# Altium PCB BauhallenUhr_Variante_2.PcbDoc (part 2 of 2)
Units mm, origin at the board's own origin, x right, y up, seen from the top; angles counter-clockwise.
Board outline 106.68 x 66.04 mm, 4 copper layers (Top Layer, Signal Layer 2, GND Layer 3, Bottom Layer), stack 1.54 mm thick; 120 components, 80 nets, 567 pads, 180 vias.
Unrouted connection lines stored in the file: 12.
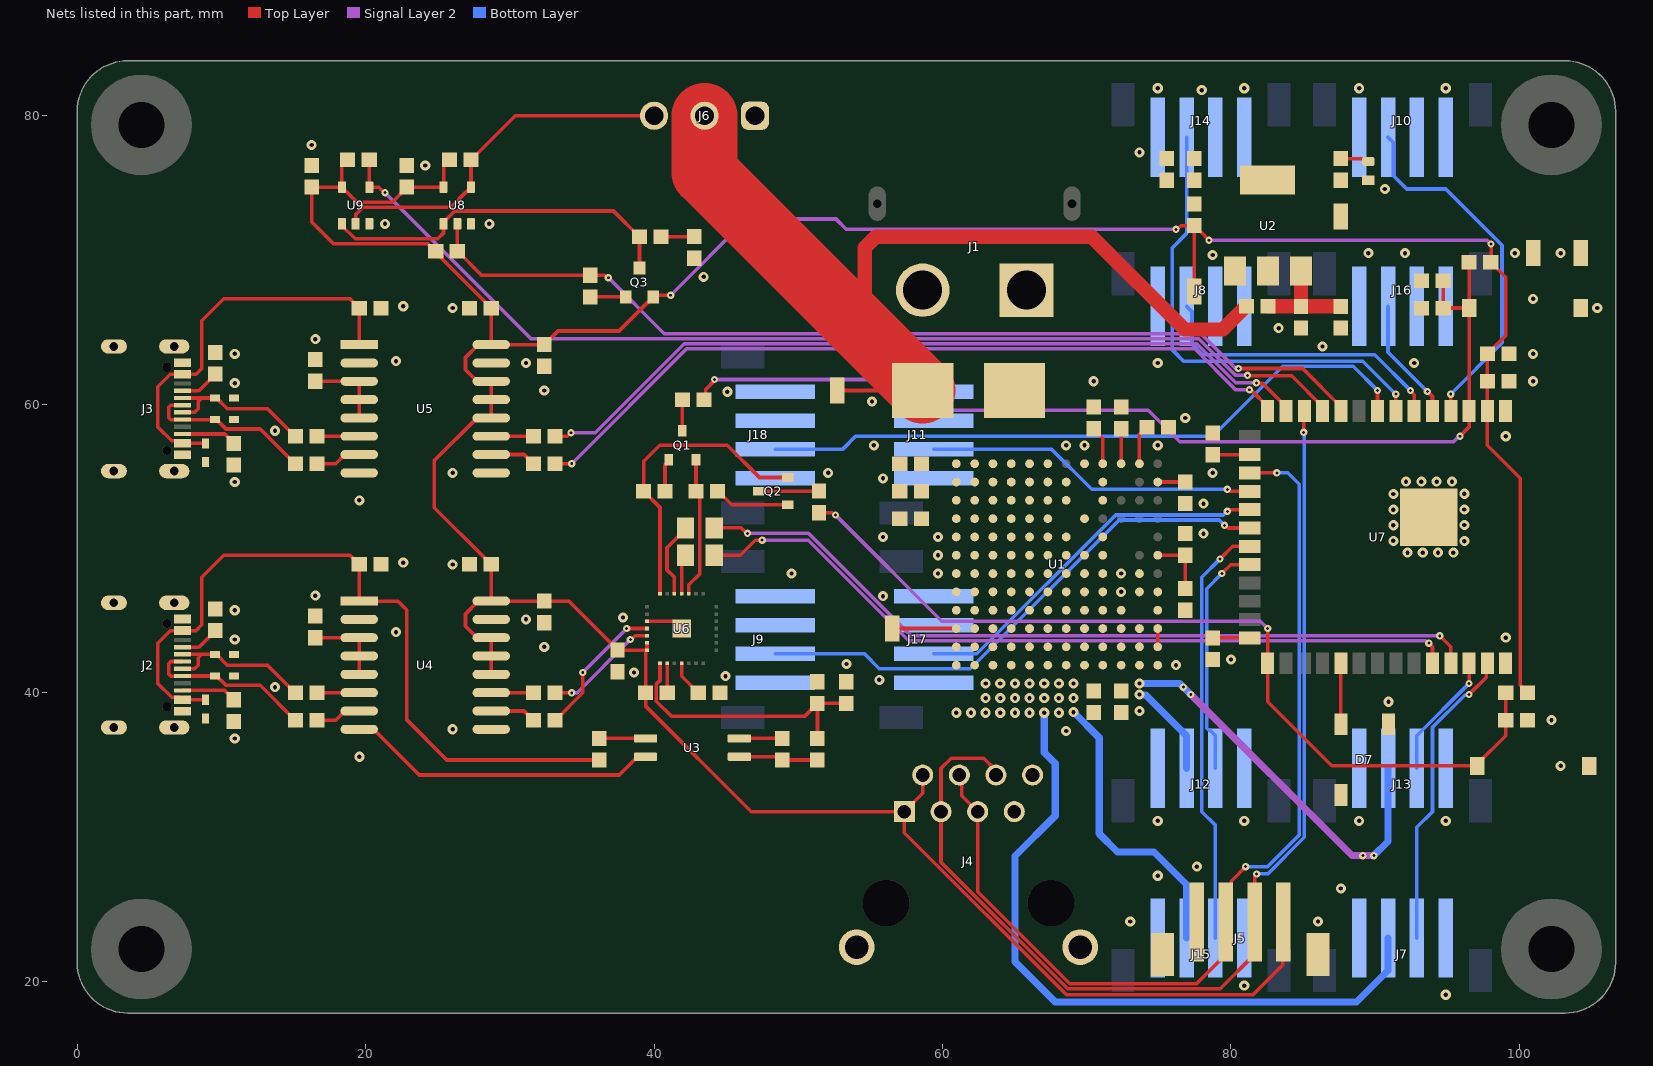
[diagram p4: the nets of this part, all layers, seen from the top]

## Part data
C1 C2 C3 C4 C5 C6 C7 C8 C9 C10 C11 C12 C13 C14 C15 C16 C17 C18 C19 C20 C21 C22 C23 C24 C25 C26 C27 C28 C29: library part Capacitor, "0603"
D1 D2 D3 D4 D5 D6: library part ESD_Protection_Diode, ComponentLink1Description=Supplier, ComponentLink1URL=https://www.digikey.com/en/products/detail/onsemi/ESD5B5-0ST1G/1792206
F1: library part Fuse, "FUSE BRD MNT 10A 125VAC/VDC SMD"
J1: library part PCB_Connector, "Socket, DC supply, male, PIN: 2.", Package=Package, Check_prices=https://www.snapeda.com/parts/XT60PW-M/AMASS/view-part/?ref=eda, MF=AMASS, MP=XT60PW-M, SnapEDA_Link=https://www.snapeda.com/parts/XT60PW-M/AMASS/view-part/?ref=snap
J2 J3: "USB - C - Port"
J4: library part RJ45, "Jack Modular Connector 8p8c (RJ45, Ethernet) 90Â° Angle (Right) Shielded Cat3.", Package=None, Check_prices=https://www.snapeda.com/parts/RJE091884511C/Amphenol/view-part/?ref=eda, MF="Amphenol ICC (Commercial Products)", MP=RJE091884511C, SnapEDA_Link=https://www.snapeda.com/parts/RJE091884511C/Amphenol/view-part/?ref=snap, System=Connector
J5: library part Connector_SMD_Small_Symbol, "CONN HEADER SMD 4POS 2MM.", ComponentLink1Description=Supplier, ComponentLink1URL=https://www.digikey.ch/en/products/detail/jst-sales-america-inc/B4B-PH-SM4-TB/926643
J6: library part Screw_Connector, "691214110003 Wurth Elektronik"
J7 J8 J9 J10 J11 J12 J13 J14 J15 J16 J17 J18: library part Connector_SMD, "CONN HEADER SMD 4POS 2MM.", ComponentLink1Description=Supplier, ComponentLink1URL=https://www.digikey.ch/en/products/detail/jst-sales-america-inc/B4B-PH-SM4-TB/926643
LED1: library part "LED_0603, GREEN", "LED 0603, Green, 3.2 V, 20 mA, 430 mcd"
MEC1 MEC2 MEC3 MEC4: "Mounting Hole for M3 Screw, plated to connect signal"
Q1 Q2: library part NPN_Bipolar_Transistor, "SS8050 SOT - 23.", ComponentLink1Description=Supplier, ComponentLink1URL=https://www.digikey.com/en/products/detail/guangdong-inmark-electronics-co-ltd/SS8050/28539054
Q3: library part PNP_Bipolar_Transistor, "Bipolar (BJT) Transistor PNP 25 V 500 mA 150MHz 300 mW Surface Mount SOT-23."
R1 R2 R3 R4 R5 R6 R7 R8 R9 R10 R11 R12 R13 R14 R15 R16 R17 R18 R20 R22 R23 R24 R25 R26 R27 R28 R29 R30 R31 R32 R33 R34 R35 R36 R37 R38 R39 R40: library part Resistor, "0603"
R19 R21: library part 0805_Resistor, "0805"
S1 S2: library part Button
TP1 TP2 TP3 TP4 TP5 TP6: "Prüfstecker und Messbuchsen EZ BoardWare S27 SMT Mini Test Terminal, Reel"
U1: library part DCDC_Converter, "Module DC-DC 1-OUT 0.6V to 5V 15A Automotive 133-Pin BGA Tray.", Package="BGA -133 Analog Devices", Availability="In Stock", Check_prices=https://www.snapeda.com/parts/LTM4627EY%23PBF/Analog+Devices/view-part/?ref=eda, MF="Analog Devices", MP=LTM4627EY#PBF, Price=None, Purchase-URL=https://pricing.snapeda.com/search/part/LTM4627EY#PBF/?ref=eda, SnapEDA_Link=https://www.snapeda.com/parts/LTM4627EY%23PBF/Analog+Devices/view-part/?ref=snap
U2: "LDO, 3.3V and 800mA.", ComponentLink1Description=Datasheet, ComponentLink1URL=chrome-extension://efaidnbmnnnibpcajpcglclefindmkaj/https://www.st.com/content/ccc/resource/technical/document/datasheet/99/3b/7d/91/91/51/4b/be/CD00000544.pdf/files/CD00000544.pdf/jcr:content/translations/en.CD00000544.pdf, ComponentLink2Description=Supplier, ComponentLink2URL=https://www.digikey.ch/en/products/detail/stmicroelectronics/LD1117S33CTR/585765
U3: library part Optocoupler, "Optoisolator Transistor Output 3750Vrms 1 Channel 4-SO."
U4 U5: library part USB_Digital_Isolator, "DGT ISOL 2500VRMS 2CH USB 16SOIC."
U6: "USB to UART bridge.", ComponentLink1Description=Datasheet, ComponentLink1URL=chrome-extension://efaidnbmnnnibpcajpcglclefindmkaj/https://www.silabs.com/documents/public/data-sheets/cp2102n-datasheet.pdf, ComponentLink2Description=Supplierlink, ComponentLink2URL=https://www.digikey.ch/en/products/detail/silicon-laboratories-inc/CP2102N-A02-GQFN28R/9863486?utm_source=findchips&utm_medium=aggregator&utm_campaign=buynow
U7: library part ESP32-S3-WROOM-2-N32R16V, "Bluetooth, WiFi 802.11b/g/n, Bluetooth v5.0 Transceiver Module 2.4GHz PCB Trace Surface Mount", Manufacturer="Espressif Systems", Supplier 1 Part Number=1965-ESP32-S3-WROOM-2-N32R16VCT-ND, Supplier 2 Part Number=356-SP32S3WM2N32R16V, Assembly Technology=SMD, ComponentLink1Description="Show Datasheet on SMS Drive", ComponentLink1URL="P:\Electronic Workshop\Datasheets (Refered in Libraries - Don't Change!)\ESP32-S3-WROOM-2-N32R16V_Digikey_1965-ESP32-S3-WROOM-2-N32R16VCT-ND.pdf", Latest Revision Date=17.10.2025, Latest Revision Made By="Simon Gimple", Latest Revision Note="New Part", Manufacturer Part Number=ESP32-S3-WROOM-2-N32R16V, Supplier 1=DigiKey, Supplier 2=Mouser
U8: library part Single_Bus_Buffer_Gate, "Single Bus Buffer Gate With 3-State Outputs, DBV0005A, LARGE T&R.", ComponentLink1Description=Supplier, ComponentLink1URL=https://www.digikey.com/en/products/detail/texas-instruments/SN74LVC1G126DBVR/385722
U9: library part Single_Bus_Buffer_Gate_Inverted, "Single Bus Buffer Gate With 3-State Outputs, DBV0005A, LARGE T&R.", ComponentLink1Description=Supplier

## Via types
v1: diameter 0.7, hole 0.3, Top Layer to Bottom Layer, 120 vias
v2: diameter 0.508, hole 0.203, Top Layer to Bottom Layer, 44 vias
v3: diameter 0.7, hole 0.3, Top Layer to Bottom Layer, tented top, 16 vias

## Nets (pads, with @x,y where several pads share a name; then routed paths per layer and width w, separated by ;. In a path a pad name is that pad's centre, name@x,y a point inside that pad or via, vN(x,y) a via of type N, cw(c..) or ccw(c..) an arc to the next point about the centre after c; other vN are vias at no path point)
+3.3V: C18.1 C19.1 C20.2 C21.2 C22.2 C23.2 C24.2 C28.2 C29.2 J4.1 J4.2 J5.1 Q3.2 R6.2 R20.2 R27.2 R32.2 R38.2 R39.2 R40.2 TP6.1 U4.12 U4.13 U4.14 U4.16 U5.12 U5.13 U5.14 U5.16 U6.6 U6.7 U7.2 U8.5 U9.5 | length 254.6
  Top Layer w0.25: R40.2@18.751,76.962 18.726,76.962 18.351,76.587 U9.5@18.351,75.062 ; R39.2@25.805,76.962 25.78,76.962 25.405,76.587 U8.5@25.405,75.062 C28.2@22.86,75.062 22.86,75.037 21.833,74.01 19.403,74.01 18.626,74.787 18.501,74.787 18.351,74.937 U9.5@18.351,75.062 ; U4.12@28.708,41.273 U4.13@28.708,42.543 U4.14@28.708,43.813 27.72,43.813 26.924,44.609 26.924,45.464 27.813,46.353 U4.16@28.708,46.353 ; U6.7@39.41,42.95 C22.2@37.465,42.95 37.465,42.975 34.087,46.353 C18.1@32.385,46.353 U4.16@28.708,46.353 ; U6.6@39.51,43.45 U6.7@39.51,42.95 39.41,42.85 R20.2@39.41,40.005 39.41,39.076 46.736,31.75 J4.1@57.36,31.75 ; v2(41.148,67.564) 40.05,67.564 Q3.2@39.939,67.453 39.939,67.403 39.664,67.128 39.614,67.128 37.571,65.085 33.335,65.085 C19.1@32.385,64.135 U5.16@28.708,64.135 ; J4.2@58.63,34.29 58.63,33.02 J4.1@57.36,31.75 ; v2(76.2,72.136) 76.27,72.136 76.524,72.39 R6.2@77.47,72.39 TP6.1@77.47,67.818 ; R6.2@77.47,72.365 77.845,71.99 77.87,71.99 v2(78.486,71.374) ; J5.1@83.645,24.094 83.599,24.048 83.599,21.115 81.534,19.05 68.606,19.05 57.36,30.296 J4.1@57.36,31.75 ; v2(98.044,71.12) 98.044,69.874 R27.2@98.02,69.85 99.06,68.81 99.06,64.77 C24.2@97.79,63.5 C23.2@97.79,61.595 U7.2@97.79,59.537 97.79,57.15 100.076,54.864 100.076,40.526 100.16,40.442 100.16,40.38 100.535,40.005 R32.2@100.56,40.005 ; U9.5@18.351,75.062 C29.2@16.256,75.062 16.256,72.644 17.78,71.12 24.322,71.12 24.83,70.612 24.88,70.612 25.255,70.237 25.255,70.128 28.308,67.075 28.308,67.05 28.683,66.675 C21.2@28.708,66.675 U5.16@28.708,64.135 ; U4.16@28.708,46.353 C20.2@28.708,48.893 28.683,48.893 28.308,49.268 28.308,49.293 24.765,52.836 24.765,56.1 27.72,59.055 U5.12@28.708,59.055 U5.13@28.708,60.325 U5.14@28.708,61.595 27.72,61.595 26.924,62.391 26.924,63.246 27.813,64.135 U5.16@28.708,64.135
  Signal Layer 2 w0.25: v2(41.148,67.564) 46.438,72.854 52.616,72.854 53.333,72.136 v2(76.2,72.136) ; v2(78.486,71.374) 97.769,71.374 98.023,71.12 v2(98.044,71.12)
+5V: C1.2 C8.2 C10.2 D7.1 J7.2 J8.2 J9.2 J10.2 J11.2 J12.2 J13.2 J14.2 J15.2 J16.2 J17.2 J18.2 R18.2 TP3.1 U1.J1 U1.J2 U1.J3 U1.J4 U1.J5 U1.J6 U1.J7 U1.J8 U1.J9 U1.J10 U1.J12 U1.K1 U1.K2 U1.K3 U1.K4 U1.K5 U1.K6 U1.K7 U1.K8 U1.K9 U1.K10 U1.K11 U1.L1 U1.L2 U1.L3 U1.L4 U1.L5 U1.L6 U1.L7 U1.L8 U1.L9 U1.L10 U1.L11 U1.M1 U1.M2 U1.M3 U1.M4 U1.M5 U1.M6 U1.M7 U1.M8 U1.M9 U1.M10 U1.M11 U3.4 | length 111.1
  Top Layer w0.25: U3.4@45.91,36.83 R18.2@48.895,36.83 ; TP3.1@56.515,44.45 U1.K1@60.96,44.45
  Signal Layer 2 w0.5: v2(77.216,39.878) 88.392,28.702 v2(89.916,28.702)
  Bottom Layer w0.5: v1(67.056,38.608) 67.056,35.854 67.818,35.092 67.818,31.462 65.024,28.668 65.024,21.336 67.818,18.542 88.705,18.542 90.9,20.737 J7.2@90.9,22.987 ; v1(69.087,38.653) 70.866,36.873 70.866,30.226 72.136,28.956 74.676,28.956 76.93,26.702 J15.2@76.93,22.987 ; v1(73.66,39.878) 73.698,39.84 74.102,39.84 76.93,37.012 J12.2@76.93,34.762 ; v1(73.66,40.64) 76.454,40.64 v2(77.216,39.878) ; v2(89.916,28.702) 90.9,29.686 J13.2@90.9,34.762
  other v1: 60.96,38.608 61.976,38.608 62.992,38.608 64.008,38.608 65.024,38.608 66.04,38.608 68.072,38.608 62.992,39.624 64.008,39.624 65.024,39.624 66.04,39.624 67.056,39.624 68.072,39.624 69.088,39.624 62.992,40.64 64.008,40.64 65.024,40.64 66.04,40.64 67.056,40.64 68.072,40.64 69.088,40.64
  other v2: 89.154,28.702 76.708,40.386
+12V: C9.2 C11.2 C12.2 F1.2 J6.2 R2.1 R3.2 TP1.1 U1.A1 U1.A2 U1.A3 U1.A4 U1.A5 U1.A6 U1.B1 U1.B2 U1.B3 U1.B4 U1.B5 U1.B6 U1.C1 U1.C2 U1.C3 U1.C4 U1.C5 U1.C6 | length 67.1
  Top Layer w0.25: TP1.1@52.705,60.96 F1.2@58.63,60.96
  Top Layer w1: 54.334,65.256 54.61,65.532 54.61,70.866 55.372,71.628 70.358,71.628 76.8,65.186 79.447,65.186 81.05,66.79 R2.1@81.075,66.79
  Top Layer w4.572: J6.2@43.505,80.01 43.505,76.085 54.334,65.256 F1.2@58.63,60.96
D1: J7.3 U7.39 | length 21.2
  Top Layer w0.25: v2(96.52,39.878) 97.7,41.058 97.7,41.947 U7.39@97.79,42.037
  Bottom Layer w0.25: J7.3@92.9,22.987 92.9,30.67 93.98,31.75 93.98,37.597 96.212,39.829 96.471,39.829 v2(96.52,39.878)
D2: J13.3 U7.38 | length 8.8
  Top Layer w0.25: v2(96.52,40.64) U7.38@96.52,42.037
  Bottom Layer w0.25: J13.3@92.9,34.762 92.9,37.012 96.52,40.632 v2(96.52,40.64)
D3: J10.3 U7.4 | length 25.3
  Top Layer w0.25: U7.4@95.25,59.537 v2(95.25,60.706)
  Bottom Layer w0.25: J10.3@90.9,78.522 91.275,78.147 91.275,75.857 92.202,74.93 94.911,74.93 98.806,71.035 98.806,64.262 v2(95.25,60.706)
D4: J16.3 U7.5 | length 8.5
  Top Layer w0.25: v2(93.626,60.89) 93.98,60.536 U7.5@93.98,59.537
  Bottom Layer w0.25: J16.3@90.9,66.801 90.9,63.616 v2(93.626,60.89)
D5: J8.3 U7.6 | length 20.8
  Top Layer w0.25: v2(92.456,60.96) 92.456,60.916 92.71,60.662 U7.6@92.71,59.537
  Bottom Layer w0.25: J8.3@76.93,66.801 77.305,66.426 77.305,64.176 78.048,63.433 89.983,63.433 v2(92.456,60.96)
D6: J14.3 U7.7 | length 33.1
  Top Layer w0.25: U7.7@91.44,59.537 v2(91.44,60.706)
  Bottom Layer w0.25: J14.3@76.93,78.522 76.93,71.85 75.946,70.866 75.946,63.767 76.721,62.992 89.154,62.992 v2(91.44,60.706)
D7: J11.3 U7.18 | length 23.1
  Top Layer w0.25: v2(79.756,54.102) 79.826,54.102 79.966,53.962 U7.18@81.3,53.962
  Bottom Layer w0.25: J11.3@59.4,56.871 67.589,56.871 70.358,54.102 v2(79.756,54.102)
D8: J17.3 U7.19 | length 26
  Top Layer w0.25: v2(79.756,52.578) 79.826,52.578 79.94,52.692 U7.19@81.3,52.692
  Bottom Layer w0.25: J17.3@59.4,42.692 59.402,42.694 62.379,42.694 72.009,52.324 79.481,52.324 79.735,52.578 v2(79.756,52.578)
D9: J9.3 U7.20 | length 37.8
  Top Layer w0.25: v2(79.555,51.608) 79.625,51.608 79.811,51.422 U7.20@81.3,51.422
  Bottom Layer w0.25: J9.3@48.4,42.692 54.59,42.692 55.626,41.656 61.933,41.656 72.251,51.974 79.19,51.974 v2(79.555,51.608)
D10: J15.3 U7.21 | length 29.6
  Top Layer w0.25: v2(79.248,49.276) 80.124,50.152 U7.21@81.3,50.152
  Bottom Layer w0.25: J15.3@78.93,22.987 78.93,30.798 77.978,31.75 77.978,48.006 v2(79.248,49.276)
D11: J12.3 U7.22 | length 16.4
  Top Layer w0.25: v2(79.375,48.26) 79.997,48.882 U7.22@81.3,48.882
  Bottom Layer w0.25: J12.3@78.93,34.762 78.93,37.012 78.555,37.387 78.474,37.387 78.328,37.533 78.328,47.213 v2(79.375,48.26)
D12: J18.3 U7.8 | length 46.3
  Top Layer w0.25: U7.8@90.17,59.537 v2(90.17,60.96)
  Bottom Layer w0.25: J18.3@48.4,56.871 53.061,56.871 53.975,57.785 78.74,57.785 83.597,62.642 88.488,62.642 v2(90.17,60.96)
DATA: J6.3 R39.1 U8.4 U9.2 | length 25.3
  Top Layer w0.25: U9.2@19.301,72.512 19.301,73.149 19.812,73.66 25.903,73.66 27.03,74.787 27.155,74.787 27.305,74.937 U8.4@27.305,75.062 R39.1@27.305,76.962 ; R39.1@27.33,76.962 30.378,80.01 J6.3@40.005,80.01
DTR: Q2.2 R28.2 U6.28 | length 21
  Top Layer w0.25: U6.28@40.41,46.85 40.41,52.845 39.28,53.975 39.28,56.044 40.386,57.15 45.085,57.15 47.31,54.925 Q2.2@49.27,54.925
EN: C25.2 C26.2 R27.1 R30.2 S1.2 U7.3 | length 71.4
  Top Layer w0.25: R30.2@43.46,60.325 43.597,60.462 43.597,61.054 44.196,61.652 v2(44.196,61.722) ; C25.2@94.73,68.58 C26.2@94.73,66.675 S1.2@96.52,66.675 ; v2(95.885,57.785) 96.52,58.42 U7.3@96.52,59.537 S1.2@96.52,66.675 ; R27.1@96.52,69.85 S1.2@96.52,66.675
  Signal Layer 2 w0.25: v2(44.196,61.722) 55.525,61.722 57.663,59.584 74.274,59.584 76.454,57.404 95.44,57.404 95.821,57.785 v2(95.885,57.785)
GND: C2.1 C3.1 C4.1 C5.1 C6.1 C7.1 C8.1 C9.1 C10.1 C11.1 C12.1 C15.2 C18.2 C19.2 C20.1 C21.1 C22.1 C23.1 C24.1 C25.1 C26.1 C27.1 C28.1 C29.1 D7.3 J1.2 J4.7 J4.8 J4.SH1 J4.SH2 J5.4 J5.SH1 J5.SH2 J6.1 J7.1 J7.4 J8.1 J8.4 J9.1 J9.4 J10.1 J10.4 J11.1 J11.4 J12.1 J12.4 J13.1 J13.4 J14.1 J14.4 J15.1 J15.4 J16.1 J16.4 J17.1 J17.4 J18.1 J18.4 LED1.K R1.1 R4.1 R13.1 R26.1 R33.2 R34.2 R37.1 S1.1 S2.1 TP4.1 TP5.1 U1.A8 U1.B7 U1.B9 U1.C7 U1.C9 U1.D1 U1.D2 U1.D3 U1.D4 U1.D5 U1.D6 U1.D8 U1.E1 U1.E2 U1.E3 U1.E4 U1.E5 U1.E6 U1.E7 U1.E9 U1.F1 U1.F2 U1.F3 U1.F4 U1.F5 U1.F6 U1.F7 U1.F8 U1.F9 U1.G1 U1.G2 U1.G3 U1.G4 U1.G5 U1.G6 U1.G7 U1.G8 U1.G9 U1.G11 U1.H1 U1.H2 U1.H3 U1.H4 U1.H5 U1.H6 U1.H7 U1.H8 U1.H9 U1.H11 U1.H12 U1.M12 U2.1 U4.9 U4.15 U5.9 U5.15 U6.3 U6.29 U7.1 U7.40 U7.41 U8.3 U9.3 | length 2.6
  Top Layer w0.25: U6.3@39.51,44.95 41.41,44.95 U6.29@41.91,44.45
  other v1: 94.9,19.05 80.93,19.685 73.025,24.13 86.045,24.13 87.63,26.416 74.93,27.305 77.645,27.94 74.93,31.115 80.93,31.115 88.9,31.115 94.9,31.115 102.87,34.925 68.58,37.338 26.035,37.465 102.235,38.1 73.66,38.735 90.93,39.37 55.626,40.894 44.958,41.148 38.608,41.402 76.2,41.91 53.34,41.987 80.01,42.302 32.385,43.18 99.06,43.815 31.115,45.085 37.846,45.212 55.88,46.692 72.39,46.99 49.53,48.26 59.69,48.26 72.39,48.26 26.035,48.895 59.69,49.53 55.88,50.8 59.69,50.8 78.105,51.03 78.105,53.11 55.88,54.864 26.035,55.245 52.07,55.245 78.74,55.245 55.245,57.15 68.58,57.15 69.85,57.15 74.93,57.15 99.06,57.785 76.835,59.055 55.118,60.198 45.085,60.871 32.385,60.96 70.485,61.595 100.965,61.595 31.115,62.865 74.93,62.865 92.71,62.865 100.965,63.5 86.36,64.008 83.312,65.278 26.035,66.675 105.41,66.675 100.965,67.31 43.434,68.834 78.74,70.358 89.535,70.485 92.075,70.485 99.695,70.485 102.87,70.485 21.336,72.512 28.575,72.517 90.678,74.93 24.13,76.562 73.66,77.47 16.256,77.978 77.978,81.788 74.93,81.915 80.93,81.915 88.9,81.915 94.9,81.915
  other v3: 92.246,49.71 93.308,49.71 94.37,49.71 95.432,49.71 96.195,50.51 91.27,50.526 91.27,51.61 96.195,51.626 91.27,52.694 96.195,52.71 91.27,53.778 96.195,53.794 92.145,54.635 93.207,54.635 94.269,54.635 95.331,54.635
GND_A: C13.1 C16.2 D1.A D3.A D5.A J2.A1_B12 J2.B1_A12 J2.SH1 J2.SH2 J2.SH3 J2.SH4 R7.2 R8.2 U3.2 U4.2 U4.8 | length 21.7
  Top Layer w0.25: U4.8@19.552,37.463 20.54,37.463 23.713,34.29 37.592,34.29 38.702,35.4 39.25,35.4 U3.2@39.41,35.56
  other v1: 19.558,35.558 10.922,36.828 13.716,40.384 10.922,43.686 22.098,44.196 10.922,45.718 16.51,46.734 22.606,49.02
GND_B: C14.1 C17.2 D2.A D4.A D6.A J3.A1_B12 J3.B1_A12 J3.SH1 J3.SH2 J3.SH3 J3.SH4 R9.2 R10.2 U5.2 U5.8
  other v1: 19.558,53.34 10.922,54.61 13.716,58.166 10.922,61.468 22.098,62.992 10.922,63.5 16.51,64.516 22.606,66.802
GPIO0: C27.2 R31.2 R32.1 S2.2 U7.27 | length 61.8
  Top Layer w0.25: R31.2@51.435,52.475 52.357,52.475 52.508,52.324 v2(52.578,52.324) ; v2(82.55,44.45) 82.55,39.37 86.995,34.925 S2.2@97.09,34.925 97.09,35.05 99.06,37.02 C27.2@99.06,38.1 R32.1@99.06,40.005
  Signal Layer 2 w0.25: v2(52.578,52.324) 59.944,44.958 82.042,44.958 v2(82.55,44.45)
GPIO19: D4.K J3.A7 J3.B7 R16.1 | length 11
  Top Layer w0.25: J3.A7@7.295,59.44 8.132,59.44 8.382,59.69 8.382,60.198 8.624,60.44 8.636,60.44 ; J3.B7@7.295,60.44 8.636,60.44 ; R16.1@15.125,57.785 15.1,57.785 13.195,59.69 10.41,59.69 9.66,60.44 D4.K@9.56,60.44 8.636,60.44
GPIO19_2: R24.2 U7.13 | length 55.4
  Top Layer w0.25: R24.2@33.135,57.785 33.97,57.785 34.211,58.026 v2(34.236,58.026) ; v2(81.767,61.489) 81.816,61.44 82.217,61.44 83.82,59.837 U7.13@83.82,59.537
  Signal Layer 2 w0.25: v2(34.236,58.026) 35.928,58.026 42.097,64.195 77.635,64.195 80.34,61.489 v2(81.767,61.489)
GPIO20: D6.K J3.A6 J3.B6 R17.1 | length 11.8
  Top Layer w0.25: J3.A6@7.295,59.94 7.291,59.944 6.496,59.944 6.35,59.798 6.35,59.074 6.496,58.928 7.283,58.928 J3.B6@7.295,58.94 D6.K@9.56,58.94 9.66,58.94 10.31,58.29 12.69,58.29 15.1,55.88 R17.1@15.125,55.88
GPIO20_2: R25.2 U7.14 | length 54.7
  Top Layer w0.25: R25.2@33.135,55.88 v2(34.29,55.88) ; v2(81.288,61.01) 81.337,60.961 81.426,60.961 82.55,59.837 U7.14@82.55,59.537
  Signal Layer 2 w0.25: v2(34.29,55.88) 42.255,63.845 77.49,63.845 80.324,61.01 v2(81.288,61.01)
NetC1_1: C1.1 R1.2 U1.F12 | length 4.2
  Top Layer w0.25: U1.F12@74.93,49.53 R1.2@76.835,49.53 C1.1@76.835,47.22
NetC2_2: C2.2 C3.2 R2.2 U2.3 | length 7.5
  Top Layer w1: R2.2@82.575,66.79 C2.2@84.861,66.79 ; U2.3@84.861,69.24 C2.2@84.861,66.79 ; C3.2@87.63,66.79 C2.2@84.861,66.79
NetC4_2: C4.2 C6.2 R5.2 R6.1 TP2.1 U2.2 U2.4
NetC5_2: C5.2 U1.A9 | length 2.7
  Top Layer w0.25: C5.2@70.485,58.305 70.485,58.28 71.12,57.645 U1.A9@71.12,55.88
NetC7_2: C7.2 U1.A11 | length 2.8
  Top Layer w0.25: U1.A11@73.66,55.88 73.66,57.925 74.155,58.42 C7.2@74.18,58.42
NetC15_1: C15.1 R12.1 R13.2 U6.8 | length 19.2
  Top Layer w0.25: U6.8@40.41,42.05 40.41,40.848 40.16,40.598 40.16,39.412 41.218,38.354 50.43,38.354 R13.2@51.331,39.255 ; R12.1@51.331,36.83 R13.2@51.331,39.255 ; C15.1@53.34,39.255 R13.2@51.331,39.255
NetC16_1: C16.1 U4.3 U4.4 U4.5 | length 5.6
  Top Layer w0.25: C16.1@16.51,43.813 U4.3@19.552,43.813 U4.5@19.552,41.273
NetC17_1: C17.1 U5.3 U5.4 U5.5 | length 5.6
  Top Layer w0.25: C17.1@16.51,61.595 U5.3@19.552,61.595 U5.5@19.552,59.055
NetD7_4: D7.4 U7.31 | length 4.2
  Top Layer w0.25: D7.4@87.63,37.809 U7.31@87.63,42.037
NetF1_1: F1.1 J1.1
NetJ2_A5: J2.A5 R8.1 | length 2.8
  Top Layer w0.25: J2.A5@7.295,43.158 8.435,43.158 9.56,44.283 R8.1@9.56,44.308
NetJ2_B5: J2.B5 R7.1 | length 3.8
  Top Layer w0.25: J2.B5@7.295,40.158 10.235,40.158 10.86,39.533 R7.1@10.86,39.508
NetJ3_A5: J3.A5 R10.1 | length 2.8
  Top Layer w0.25: J3.A5@7.295,60.94 8.435,60.94 9.56,62.065 R10.1@9.56,62.09
NetJ3_B5: J3.B5 R9.1 | length 3.8
  Top Layer w0.25: J3.B5@7.295,57.94 10.235,57.94 10.86,57.315 R9.1@10.86,57.29
NetLED1_A: LED1.A R5.1 | length 2
  Top Layer w0.25: R5.1@87.63,77.04 89.215,77.04 89.415,76.84 LED1.A@89.535,76.84
NetQ1_1: Q1.1 R28.1 | length 2.3
  Top Layer w0.25: R28.1@40.755,53.975 40.755,55.785 41.01,56.04 Q1.1@41.01,56.14
NetQ1_3: Q1.3 R30.1 | length 2.2
  Top Layer w0.25: Q1.3@41.96,58.16 R30.1@41.96,60.325
NetQ2_1: Q2.1 R29.1 | length 5.3
  Top Layer w0.25: R29.1@44.41,53.975 44.435,53.975 45.385,53.025 Q2.1@49.27,53.025
NetQ2_3: Q2.3 R31.1 | length 4.2
  Top Layer w0.25: Q2.3@47.25,53.975 R31.1@51.435,53.975
NetQ3_1: Q3.1 R35.1 | length 2.5
  Top Layer w0.25: R35.1@35.56,67.453 Q3.1@38.039,67.453
NetR3_1: R3.1 U1.A10 | length 2.4
  Top Layer w0.25: U1.A10@72.39,55.88 R3.1@72.39,58.305
NetR4_2: R4.2 U1.B12 | length 1.9
  Top Layer w0.25: U1.B12@74.93,54.61 R4.2@76.835,54.61
NetR11_1: R11.1 U3.1 | length 3.2
  Top Layer w0.25: R11.1@36.195,36.83 U3.1@39.41,36.83
NetR12_2: R12.2 R18.1 U3.3 | length 5.5
  Top Layer w0.25: U3.3@45.91,35.56 48.665,35.56 R18.1@48.895,35.33 R12.2@51.331,35.33
NetR14_2: R14.2 U4.6 | length 2.9
  Top Layer w0.25: R14.2@16.625,40.003 U4.6@19.552,40.003
NetR15_2: R15.2 U4.7 | length 3.2
  Top Layer w0.25: R15.2@16.625,38.098 17.929,38.098 18.564,38.733 U4.7@19.552,38.733
NetR16_2: R16.2 U5.6 | length 2.9
  Top Layer w0.25: R16.2@16.625,57.785 U5.6@19.552,57.785
NetR17_2: R17.2 U5.7 | length 3.2
  Top Layer w0.25: R17.2@16.625,55.88 17.929,55.88 18.564,56.515 U5.7@19.552,56.515
NetR19_2: R19.2 U6.25 | length 2.8
  Top Layer w0.25: U6.25@41.91,46.85 41.91,49.262 R19.2@42.178,49.53
NetR20_1: R20.1 U6.9 | length 2
  Top Layer w0.25: R20.1@40.91,40.005 U6.9@40.91,42.05
NetR21_2: R21.2 U6.26 | length 5.3
  Top Layer w0.25: U6.26@41.41,46.85 41.41,47.998 40.894,48.514 40.894,50.046 41.677,50.829 41.699,50.829 42.178,51.308 R21.2@42.178,51.435
NetR22_1: R22.1 U4.11 | length 2.9
  Top Layer w0.25: U4.11@28.708,40.003 R22.1@31.635,40.003
NetR23_1: R23.1 U4.10 | length 3.2
  Top Layer w0.25: U4.10@28.708,38.733 30.975,38.733 31.61,38.098 R23.1@31.635,38.098
NetR24_1: R24.1 U5.11 | length 2.9
  Top Layer w0.25: U5.11@28.708,57.785 R24.1@31.635,57.785
NetR25_1: R25.1 U5.10 | length 3.2
  Top Layer w0.25: U5.10@28.708,56.515 30.975,56.515 31.61,55.88 R25.1@31.635,55.88
NetR26_2: R26.2 U6.11 | length 2.5
  Top Layer w0.25: U6.11@41.91,42.05 41.91,41.135 43.04,40.005 R26.2@43.065,40.005
NetR33_1: R33.1 U7.26 | length 2.6
  Top Layer w0.25: R33.1@78.74,43.802 U7.26@81.3,43.802
NetR34_1: R34.1 U7.16 | length 2.6
  Top Layer w0.25: R34.1@78.74,56.502 U7.16@81.3,56.502
NetR36_1: R36.1 R37.2 | length 2.3
  Top Layer w0.25: R36.1@40.489,71.628 R37.2@42.799,71.628
RTS: Q1.2 R29.2 U6.24 | length 9.7
  Top Layer w0.25: U6.24@42.41,46.85 42.41,47.488 43.18,48.258 43.18,53.705 R29.2@42.91,53.975 Q1.2@42.91,56.14
SCL: J4.4 J4.5 J5.3 U7.17 | length 68.7
  Top Layer w0.25: J4.4@61.17,34.29 61.331,34.129 61.331,32.859 J4.5@62.44,31.75 62.44,26.206 68.834,19.812 77.613,19.812 79.645,21.844 J5.3@79.645,24.094 80.02,24.469 80.02,26.934 v2(81.026,27.94) ; U7.17@81.3,55.232 81.313,55.245 v2(83.185,55.245)
  Bottom Layer w0.25: v2(81.026,27.94) 82.55,27.94 84.74,30.13 84.74,54.452 83.947,55.245 v2(83.185,55.245)
SDA: J4.3 J4.6 J5.2 U7.12 | length 77.2
  Top Layer w0.25: J4.6@63.71,34.29 63.71,34.599 62.852,35.456 60.602,35.456 59.9,34.754 J4.3@59.9,31.75 59.9,28.251 68.689,19.462 79.263,19.462 81.645,21.844 J5.2@81.645,24.094 81.645,27.219 81.788,27.362 v2(81.788,27.432) ; v2(85.05,58.052) 85.05,59.497 U7.12@85.09,59.537
  Bottom Layer w0.25: v2(81.788,27.432) 82.55,27.432 85.09,29.972 85.09,58.012 v2(85.05,58.052)
TX_EN: Q3.3 R36.2 U8.1 U9.1 | length 25.3
  Top Layer w0.25: U9.1@18.351,72.512 18.351,72.387 19.268,71.47 24.988,71.47 25.4,71.882 25.4,72.507 U8.1@25.405,72.512 25.405,72.637 26.174,73.406 37.186,73.406 38.964,71.628 R36.2@38.989,71.628 Q3.3@38.989,69.453
U0_RXD: R19.1 U7.36 | length 54.4
  Top Layer w0.25: R19.1@44.182,49.53 45.974,49.53 47.019,50.575 v2(47.498,50.575) ; v2(93.726,43.434) 93.726,43.416 93.98,43.162 U7.36@93.98,42.037
  Signal Layer 2 w0.25: v2(47.498,50.575) 50.688,50.575 57.671,43.592 93.498,43.592 93.656,43.434 v2(93.726,43.434)
U0_TXD: R21.1 U7.37 | length 55.6
  Top Layer w0.25: R21.1@44.182,51.435 46.031,51.435 46.412,51.054 v2(46.482,51.054) ; v2(94.488,43.942) 95.25,43.18 U7.37@95.25,42.037
  Signal Layer 2 w0.25: v2(46.482,51.054) 50.704,51.054 57.816,43.942 v2(94.488,43.942)
U1_RXD: R40.1 U7.11 U9.4 | length 74.6
  Top Layer w0.25: R40.1@20.251,76.962 U9.4@20.251,75.062 20.901,75.062 21.287,74.676 v2(21.336,74.676) ; v2(81.157,62.005) 81.186,61.976 84.221,61.976 86.36,59.837 U7.11@86.36,59.537
  Signal Layer 2 w0.25: v2(21.336,74.676) 31.467,64.545 77.78,64.545 80.32,62.005 v2(81.157,62.005)
U1_TXD: R35.2 R38.1 U7.10 U8.2 | length 67.9
  Top Layer w0.25: U8.2@26.355,72.512 R38.1@26.355,70.612 26.38,70.612 28.039,68.953 36.584,68.953 36.764,68.773 v2(36.834,68.773) ; v2(80.518,62.484) 84.983,62.484 87.63,59.837 U7.10@87.63,59.537
  Signal Layer 2 w0.25: v2(36.834,68.773) 40.712,64.895 77.925,64.895 80.286,62.533 80.469,62.533 v2(80.518,62.484)
USB_DN: D3.K J2.A7 J2.B7 R14.1 | length 11
  Top Layer w0.25: J2.A7@7.295,41.658 8.132,41.658 8.382,41.908 8.382,42.416 8.624,42.658 8.636,42.658 ; J2.B7@7.295,42.658 8.636,42.658 ; R14.1@15.125,40.003 15.1,40.003 13.195,41.908 10.41,41.908 9.66,42.658 D3.K@9.56,42.658 8.636,42.658
USB_DN_2: R22.2 U6.5 | length 8
  Top Layer w0.25: R22.2@33.135,40.003 33.147,39.991 v2(34.29,39.991) ; v2(38.354,43.688) 38.424,43.688 38.686,43.95 U6.5@39.51,43.95
  Signal Layer 2 w0.25: 34.668,40.002 v2(38.354,43.688)
  Bottom Layer w0.25: v2(34.29,39.991) 34.301,40.002 34.668,40.002
USB_DP: D5.K J2.A6 J2.B6 R15.1 | length 11.8
  Top Layer w0.25: J2.A6@7.295,42.158 7.291,42.162 6.496,42.162 6.35,42.016 6.35,41.292 6.496,41.146 7.283,41.146 J2.B6@7.295,41.158 D5.K@9.56,41.158 9.66,41.158 10.31,40.508 12.69,40.508 15.1,38.098 R15.1@15.125,38.098
USB_DP_2: R23.2 U6.4 | length 9.8
  Top Layer w0.25: R23.2@33.135,38.098 33.16,38.098 35.052,39.99 v2(35.052,41.402) ; v2(38.1,44.45) U6.4@39.51,44.45
  Signal Layer 2 w0.25: v2(35.052,41.402) v2(38.1,44.45)
VBUS_A: C13.2 D1.K J2.A4_B9 J2.B4_A9 R11.2 U4.1 | length 53.5
  Top Layer w0.25: D1.K@8.89,39.508 J2.B4_A9@7.295,39.508 7.12,39.683 6.543,39.683 5.588,40.638 5.588,43.432 6.448,44.292 7.279,44.292 J2.A4_B9@7.295,44.308 8.242,44.308 8.636,44.702 8.636,48.004 10.16,49.528 18.917,49.528 19.152,49.293 19.152,49.268 19.527,48.893 C13.2@19.552,48.893 U4.1@19.552,46.353 22.227,46.353 22.86,45.72 22.86,38.1 25.63,35.33 R11.2@36.195,35.33
VBUS_B: C14.2 D2.K J3.A4_B9 J3.B4_A9 U5.1 | length 27.8
  Top Layer w0.25: D2.K@8.89,57.29 J3.B4_A9@7.295,57.29 7.12,57.465 6.543,57.465 5.588,58.42 5.588,61.214 6.448,62.074 7.279,62.074 J3.A4_B9@7.295,62.09 8.242,62.09 8.636,62.484 8.636,65.786 10.16,67.31 18.917,67.31 19.152,67.075 19.152,67.05 19.527,66.675 C14.2@19.552,66.675 U5.1@19.552,64.135
VOUT_LCL: U1.K12 U1.L12 | length 1.3
  Top Layer w0.25: U1.L12@74.93,43.18 U1.K12@74.93,44.45
pads on no net: D7.2 J1.SH1 J1.SH2 J2. J2.A8 J2.B8 J3. J3.A8 J3.B8 J4. J7.SH1 J7.SH2 J8.SH1 J8.SH2 J9.SH1 J9.SH2 J10.SH1 J10.SH2 J11.SH1 J11.SH2 J12.SH1 J12.SH2 J13.SH1 J13.SH2 J14.SH1 J14.SH2 J15.SH1 J15.SH2 J16.SH1 J16.SH2 J17.SH1 J17.SH2 J18.SH1 J18.SH2 MEC1.1 MEC2.1 MEC3.1 MEC4.1 U1.A7 U1.A12 U1.B11 U1.C10 U1.C11 U1.C12 U1.D9 U1.D10 U1.D11 U1.D12 U1.E12 U1.F11 U1.G12 U6.1 U6.2 U6.10 U6.12 U6.13 U6.14 U6.15 U6.16 U6.17 U6.18 U6.19 U6.20 U6.21 U6.22 U6.23 U6.27 U7.9 U7.15 U7.23 U7.24 U7.25 U7.28 U7.29 U7.30 U7.32 U7.33 U7.34 U7.35

## Polygon pours and split planes (outlines as drawn)
+5V on Top Layer "NONET_L-01_P-001" (solid, pour order 35): 60.452,46.228 77.47,46.228 77.47,45.212 74.168,45.212 74.168,39.37 69.596,39.37 69.596,38.1 60.452,38.1
+12V on Top Layer "+12V_L01_P033" (solid, pour order 33): 67.945,52.705 67.945,56.515 61.595,56.515 61.595,64.135 55.88,64.135 55.88,56.515 57.785,56.515 57.785,51.47 60.29,51.47 60.325,51.435 60.325,52.705
NetF1_1 on Top Layer "NETF1_1_L01_P034" (solid, pour order 34): 61.595,70.485 69.85,70.485 69.85,58.42 61.595,58.42
NetC4_2 on Top Layer "NETC4_2_L01_P032" (solid, pour order 32): 74.295,76.2 80.01,76.2 80.01,76.835 85.09,76.835 85.09,76.308 88.392,76.308 88.392,71.755 83.82,71.755 83.82,67.945 81.28,67.945 81.28,73.025 74.295,73.025
GND on Top Layer "GND_L01_P037" (solid, pour order 37): 0,83.82 106.68,83.82 106.68,17.78 0,17.78
GND_A on Top Layer "GND_A_L01_P025" (solid, pour order 25): 0,50.163 24.13,50.163 24.13,33.018 0,33.018
GND_B on Top Layer "GND_B_L01_P024" (solid, pour order 24): 0,67.945 24.13,67.945 24.13,50.163 0,50.163
GND on Signal Layer 2 "GND_L02_P036" (solid, pour order 36): 0,83.82 106.68,83.82 106.68,17.78 0,17.78
GND_A on Signal Layer 2 "GND_A_L02_P027" (solid, pour order 27): 0,50.163 24.13,50.163 24.13,33.018 0,33.018
GND_B on Signal Layer 2 "GND_B_L02_P026" (solid, pour order 26): 0,67.945 24.13,67.945 24.13,50.163 0,50.163
GND on GND Layer 3 "GND_L03_P038" (solid, pour order 38): 0,83.82 106.68,83.82 106.68,17.78 0,17.78
GND_A on GND Layer 3 "GND_A_L03_P029" (solid, pour order 29): 0,50.163 24.13,50.163 24.13,33.018 0,33.018
GND_B on GND Layer 3 "GND_B_L03_P028" (solid, pour order 28): 0,67.945 24.13,67.945 24.13,50.163 0,50.163
+5V on Bottom Layer "NONET_L-01_P-001" (solid, pour order 39): 60.452,38.1 60.452,39.116 62.484,39.116 62.484,41.148 74.168,41.148 74.168,39.37 69.596,39.37 69.596,38.1
GND on Bottom Layer "GND_L04_P040" (solid, pour order 40): 0,83.82 106.68,83.82 106.68,17.78 0,17.78
GND_A on Bottom Layer "GND_A_L04_P031" (solid, pour order 31): 0,50.163 24.13,50.163 24.13,33.018 0,33.018
GND_B on Bottom Layer "GND_B_L04_P030" (solid, pour order 30): 0,67.945 24.13,67.945 24.13,50.163 0,50.163

## Other copper
Top Layer:
  text "TOP (Normal Size)" at 21,-12 h1
  text "TOP (Small Size)" at 28,-18 h0.7
  text "SMS-2025.9" at 10.9,-21.5 h1
  text "SMS-2017.11 (0.7 MM IST MIN. TEXTHOEHE)" at 28,-21.5 h0.7
  text "TOP" at 10.9,-25 h1
Bottom Layer:
  text "BOT (Normal Size)" at 37,-14 h1
  text "BOT (Small Size)" at 38,-19 h0.7
  text "BOT" at 12.637,-24.819 h1

## Silkscreen, mask and mechanical layers (free items; w line width, h text height)
Top Overlay:
  drawing of 58 lines, arcs and shapes, not listed
  text "GND" at 100.33,73.69 h2.54
  text "VOUT" at 88.9,72.42 h2.54
  text "+3.3V" at 73.914,64.546 h2.54
  text "+12V" at 48.006,62.484 h2.54
  text "ESP USB" at 3.81,51.592 h2.54
  text "+5V" at 50.8,43.845 h2.54
  text "USB to UART" at 3.81,33.782 h2.54
  text "BauhallenUhr_V1.0 / BauhallenUhr Rework / Manuel Hueppi / 18.08.2026" at 9.525,20.955 h2
Top Solder:
  text "SMS-2025.9" at 10.9,-21.5 h1
  text "SMS LAB - SOMNOMAT V5" at 27.7,-23.8 h1
Mechanical 1:
  the board outline again, w0.254

## Text inside footprints (layer, text, board x,y; h text height)
J2: Mechanical 13 "PCB EDGE" at 0.508,33.782 h0.41
J3: Mechanical 13 "PCB EDGE" at 0.635,51.435 h0.41
J4: Mechanical 13 "PCB Edge" at 73.616,20.828 h0.81 r180